# EAGLE board telemetry box (EAGLE 6.3)
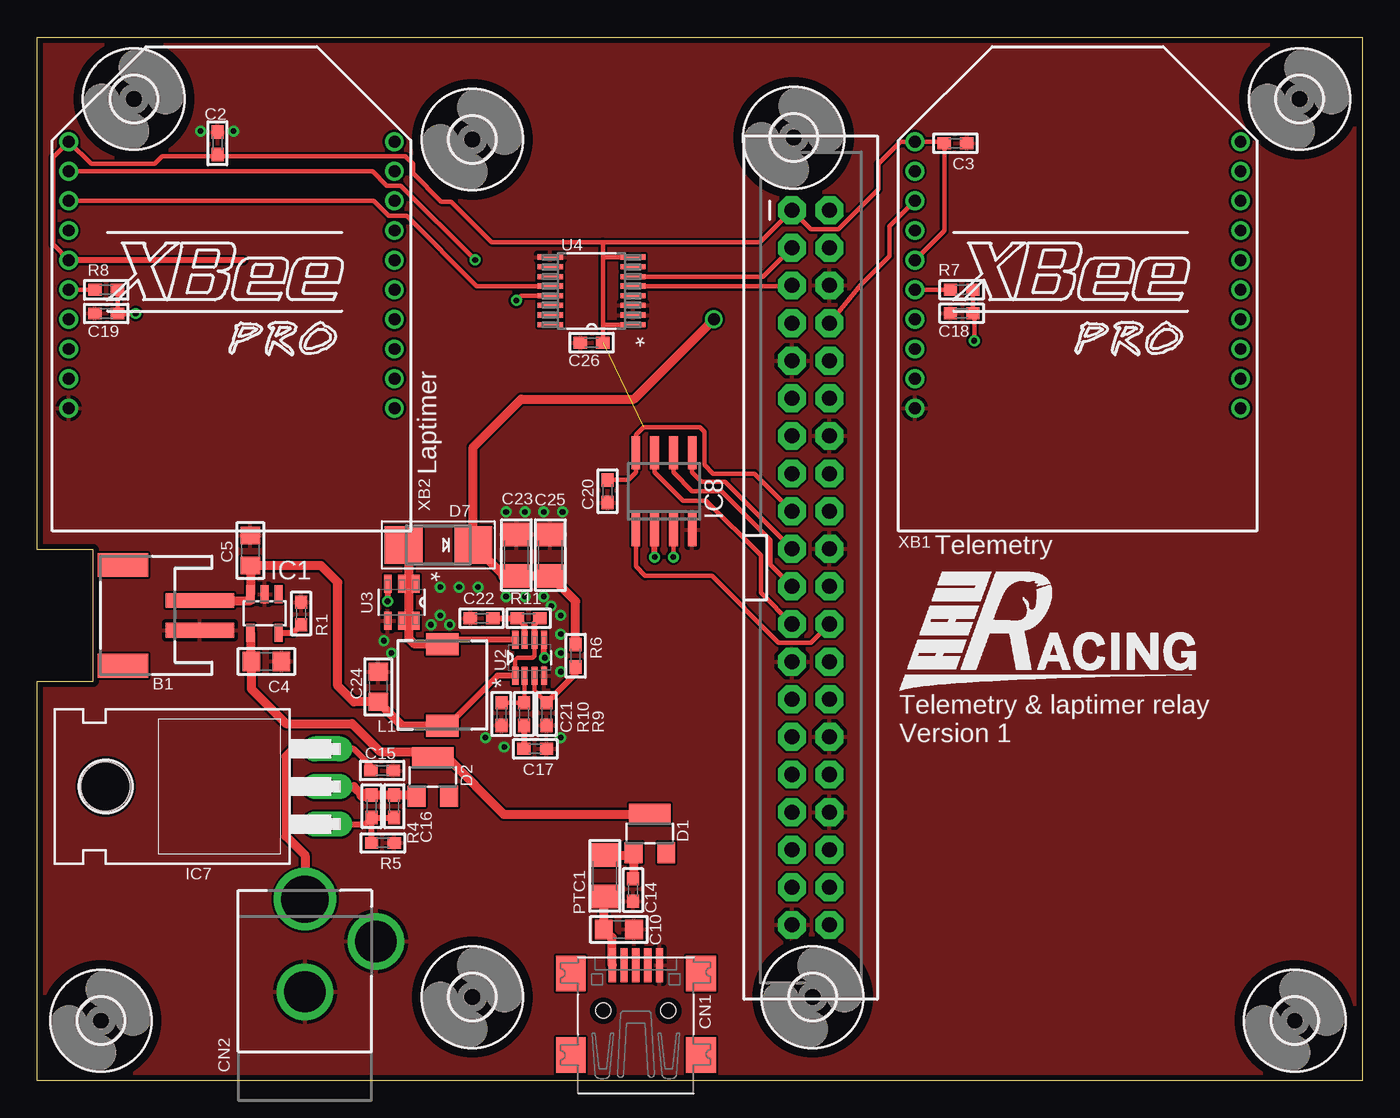
[diagram p0: board, top side]
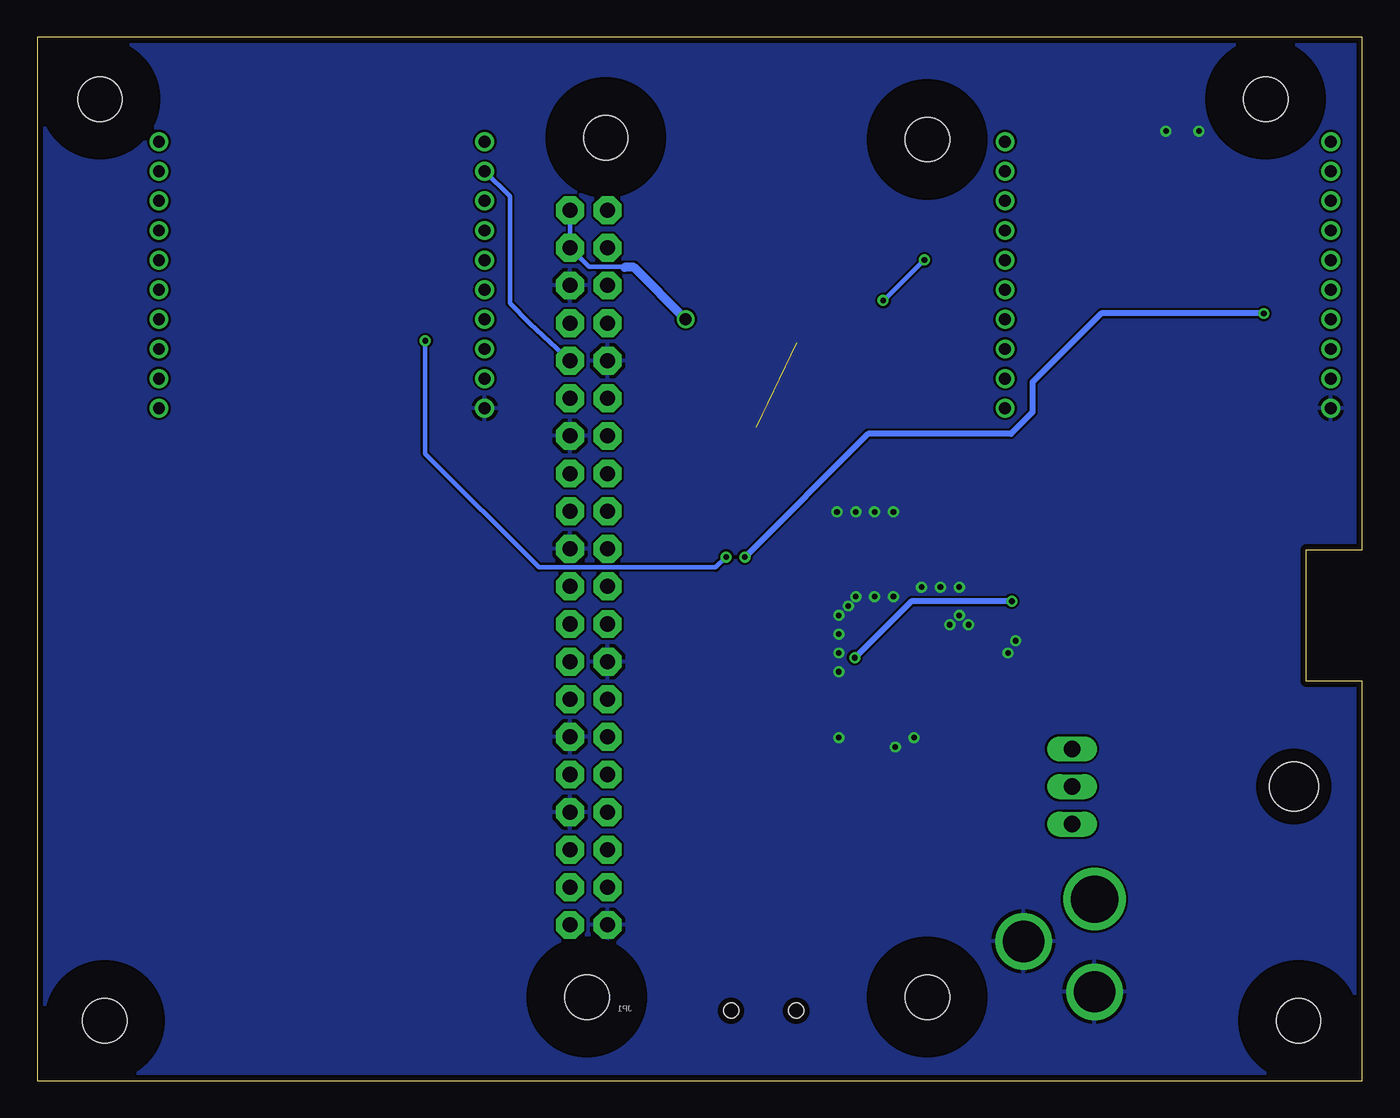
[diagram p1: board, bottom side, seen from below]

Size 89.53 x 70.48 mm. Coordinates in mm from the lower left corner, seen from the top.
Outline: 0,0 0,26.99 3.81,26.99 3.81,35.88 0,35.88 0,70.48 89.53,70.48 89.53,0 0,0
Copper layers (1*16): Top 0.0356mm / dielectric 1.5011mm / Bottom 0.0356mm
Design rules "LaenPCBOrder": minimum track width 6mil, minimum drill 13mil, track to track 6mil, track to pad 6mil, pad to pad 6mil, via to via 6mil, smd to smd 6mil, copper to edge 15mil, drill to drill 6mil, minimum pad ring 7mil, minimum via ring 7mil, stop-mask expansion 3mil, vias tented up to drill 0mil, thermal gap 10mil

## Footprints (pad centres in the part's own frame; a part is rotated, then mirrored left to right if it is on the bottom)
JSTPH2 = smd 1 x 4.6: 1 -1,-3.7; 2 1,-3.7 | smd 1.6 x 3.4: NC1 -3.4,1.5; NC2 3.4,1.5
_0603 = smd 0.9 x 0.8: 1 -0.762,0; 2 0.762,0
_0805 = smd 1.2 x 1.3: 1 -1.016,0; 2 1.016,0
1206 = smd 1.6 x 1.8: 1 -1.4,0; 2 1.4,0
USB-MINIB = smd 0.5 x 2.308: D+ 0,4.064; D- -0.8,4.064; GND 1.6,4.064; ID 0.8,4.064; VBUS -1.6,4.064 | smd 2 x 2.4: GND1 -4.4,-2; GND2 -4.4,3.5; GND3 4.4,3.5; GND4 4.4,-2 | hole 1: -2.2,1; 2.2,1
DCJACK_2MM_PTH = drill 2.8: GND 0,7.35; GNDBREAK 4.8,10.75 | drill 3.2: PWR 0,13.6
SOT23-W = smd 1.2 x 1.4: 1 -1.1,-1.3; 2 1.1,-1.3 | smd 2.8 x 1.4: 3 0,1.3
SMADIODE = smd 2.54 x 2.54: A 2.349,0; C -2.349,0
3,0 = hole 3: 0,0
SOT23-5L = smd 0.55 x 1.2: 1 -0.95,-1.3; 2 0,-1.3; 3 0.95,-1.3; 4 0.95,1.3; 5 -0.95,1.3
TO220H = drill 1.118 long: 1 -2.54,-10.16; 2 0,-10.16; 3 2.54,-10.16 | hole 3.302: 0,4.826
SO-08 = smd 0.6 x 2.2: 1 -1.905,-2.6; 2 -0.635,-2.6; 3 0.635,-2.6; 4 1.905,-2.6; 5 1.905,2.6; 6 0.635,2.6; 7 -0.635,2.6; 8 -1.905,2.6
2X20-SHROUDED = drill 1.016 pad 1.88 octagon: 1 -1.27,24.13; 2 1.27,24.13; 3 -1.27,21.59; 4 1.27,21.59; 5 -1.27,19.05; 6 1.27,19.05; 7 -1.27,16.51; 8 1.27,16.51; 9 -1.27,13.97; 10 1.27,13.97; 11 -1.27,11.43; 12 1.27,11.43; 13 -1.27,8.89; 14 1.27,8.89; 15 -1.27,6.35; 16 1.27,6.35; 17 -1.27,3.81; 18 1.27,3.81; 19 -1.27,1.27; 20 1.27,1.27; 21 -1.27,-1.27; 22 1.27,-1.27; 23 -1.27,-3.81; 24 1.27,-3.81; 25 -1.27,-6.35; 26 1.27,-6.35; 27 -1.27,-8.89; 28 1.27,-8.89; 29 -1.27,-11.43; 30 1.27,-11.43; 31 -1.27,-13.97; 32 1.27,-13.97; 33 -1.27,-16.51; 34 1.27,-16.51; 35 -1.27,-19.05; 36 1.27,-19.05; 37 -1.27,-21.59; 38 1.27,-21.59; 39 -1.27,-24.13; 40 1.27,-24.13
INDUCTOR_6X6MM_TDK_SLF6045 = smd 1.5 x 2.2: P$1 -2.75,0; P$2 2.75,0
SOT65P280X100-8N = smd 1.219 x 0.406: 1 -1.219,0.965; 2 -1.219,0.33; 3 -1.219,-0.33; 4 -1.219,-0.965; 5 1.219,-0.965; 6 1.219,-0.33; 7 1.219,0.33; 8 1.219,0.965
SOT95P285X110-6N = smd 1.219 x 0.508: 1 -1.245,0.94; 2 -1.245,0; 3 -1.245,-0.94; 4 1.245,-0.94; 5 1.245,0; 6 1.245,0.94
SOP65P640X110-16N = smd 1.702 x 0.356: 1 -2.794,2.286; 2 -2.794,1.626; 3 -2.794,0.965; 4 -2.794,0.33; 5 -2.794,-0.33; 6 -2.794,-0.965; 7 -2.794,-1.626; 8 -2.794,-2.286; 9 2.794,-2.286; 10 2.794,-1.626; 11 2.794,-0.965; 12 2.794,-0.33; 13 2.794,0.33; 14 2.794,0.965; 15 2.794,1.626; 16 2.794,2.286
XBEE-PRO = drill 0.8 pad 1.27: 1 -11,9; 2 -11,7; 3 -11,5; 4 -11,3; 5 -11,1; 6 -11,-1; 7 -11,-3; 8 -11,-5; 9 -11,-7; 10 -11,-9; 11 11,-9; 12 11,-7; 13 11,-5; 14 11,-3; 15 11,-1; 16 11,1; 17 11,3; 18 11,5; 19 11,7; 20 11,9

## Placement (x,y rotation side)
B1  [JSTPH2]  7.3,31.43 90 top
C2  100n  [_0603]  12.19,63.31 270 top
C3  100n  [_0603]  62.04,63.31 180 top
C4  10u  [_0805]  15.49,28.32 180 top
C5  10u  [_0805]  14.41,35.81 270 top
C10  10u  [_0805]  39.31,10.22 0 top
C14  100n  [_0603]  40.26,12.89 90 top
C15  100n  [_0603]  23.3,20.95 180 top
C16  1u-T  [_0603]  24.13,18.54 270 top
C17  1n8  [_0603]  33.66,22.42 180 top
C18  1u  [_0603]  62.46,51.83 0 top
C19  1u  [_0603]  4.67,51.82 0 top
C20  100n  [_0603]  38.54,39.81 90 top
C21  47p  [_0603]  31.37,24.77 90 top
C22  1n  [_0603]  30.04,31.24 0 top
C23  100u  [1206]  32.39,35.5 90 top
C24  10u  [_0805]  23.05,26.61 270 top
C25  100u  [1206]  34.67,35.5 90 top
C26  100n  [_0603]  37.47,49.85 0 top
CN1  [USB-MINIB]  40.45,3.75 0 top
CN2  [DCJACK_2MM_PTH]  18.1,-1.33 0 top
D1  [SOT23-W]  41.4,16.7 0 top
D2  [SOT23-W]  26.73,20.51 0 top
D7  B320  [SMADIODE]  27.11,36.2 180 top
H1  MOUNT-HOLE3.0  [3,0]  51.12,63.69 0 top
H2  MOUNT-HOLE3.0  [3,0]  29.4,63.56 0 top
H3  MOUNT-HOLE3.0  [3,0]  29.4,5.65 0 top
H4  MOUNT-HOLE3.0  [3,0]  52.39,5.65 0 top
H5  MOUNT-HOLE3.0  [3,0]  4.32,4.06 0 top
H6  MOUNT-HOLE3.0  [3,0]  84.96,4.06 0 top
H7  MOUNT-HOLE3.0  [3,0]  85.28,66.29 0 top
H8  MOUNT-HOLE3.0  [3,0]  6.54,66.29 0 top
IC1  MCP73831/OT  [SOT23-5L]  15.37,31.56 180 top
IC7  317T  [TO220H]  9.46,19.88 90 top
IC8  MCP3202SN  [SO-08]  42.35,39.81 0 top
JP1  RASPBERRYPI-B+-GPIO  [2X20-SHROUDED]  52.26,34.66 0 top
L1  FDVE0630-H-1R0M  [INDUCTOR_6X6MM_TDK_SLF6045]  27.37,26.73 270 top
PTC1  [1206]  38.35,13.84 270 top
R1  5k  [_0603]  17.84,31.56 270 top
R4  240  [_0603]  22.61,18.54 90 top
R5  732  [_0603]  23.37,16.07 180 top
R6  34k8  [_0603]  36.39,28.7 270 top
R7  850  [_0603]  62.46,53.42 0 top
R8  850  [_0603]  4.67,53.41 0 top
R9  11k  [_0603]  34.42,24.77 270 top
R10  17k4  [_0603]  32.89,24.77 270 top
R11  1m  [_0603]  33.21,31.24 0 top
U2  LTC3872ETS8TRMPBF  [SOT65P280X100-8N]  33.27,28.58 90 top
U3  SI3460DDV-T1-GE3  [SOT95P285X110-6N]  24.64,32.32 270 top
U4  SC16IS740IPW,112  [SOP65P640X110-16N]  37.47,53.34 180 top
XB1  XBEE-PRO  [XBEE-PRO]  70.29,54.42 0 top
XB2  XBEE-PRO  [XBEE-PRO]  13.14,54.42 0 top

## Library data of the parts
B1 C2-C5 C10 C14-C26 L1 PTC1 R1 R4-R11 XB1 XB2 = microbuilder
CN1 CN2 D1 D2 D7 IC1 = adafruit
H1-H8 = holes
IC7 = linear
IC8 = microchip; MF: MICROCHIP; MPN: MCP3202-CI/SN; OC_FARNELL: 1196803; OC_NEWARK: 19C7207
JP1 = SparkFun-Boards
U2 = LTC_By_element14_Batch_1; MPN: LTC3872ETS8#TRMPBF; OC_FARNELL: 1556409; OC_NEWARK: 56M8617; PACKAGE: SOT-23-8; SUPPLIER: LINEAR TECHNOLOGY
U3 = Vishay_By_element14_Batch_1; MPN: SI3457CDV-T1-GE3; OC_FARNELL: 1840420; OC_NEWARK: 90R9127; PACKAGE: TSOP-6; SUPPLIER: Vishay Siliconix
U4 = NXP-SC16IS740IPW-112; MPN: SC16IS740IPW,112; OC_FARNELL: 2101308; OC_NEWARK: 70R8982; PACKAGE: 16TSSOP; SUPPLIER: NXP

## Nets
3.3V: C2.2 C3.2 C20.2 C26.2 IC8.8 JP1.1 JP1.17 U4.1 U4.8 XB1.1 XB1.5 XB2.1 XB2.5
5.0V: C23.1 C25.1 D7.C JP1.2 JP1.4 R6.1
BAT-STAT1: IC1.1
CE0: IC8.1 JP1.24
CHARGE-DONE: JP1.7
CHARGING: JP1.11
GND: B1.1 C2.1 C3.1 C4.1 C5.1 C10.2 C14.1 C15.1 C17.1 C18.1 C19.1 C20.1 C21.1 C22.1 C23.2 C24.1 C25.2 C26.1 CN1.GND CN2.GND CN2.GNDBREAK IC1.2 IC8.4 JP1.6 JP1.9 JP1.14 JP1.20 JP1.25 JP1.30 JP1.34 JP1.39 R1.1 R5.1 R9.2 U2.4 U3.4 U4.2 U4.3 U4.9 XB1.10 XB2.10
LAP-RX: U4.13 XB2.2
LAP-TX: U4.12 XB2.3
LAPRSSISENSE: C19.2 IC8.2 R8.2
MISO: IC8.6 JP1.21
MOSD: D7.A L1.P$1 U2.8 U3.1 U3.2 U3.5 U3.6
MOSI: IC8.5 JP1.19
N$2: IC1.5 R1.2
N$17: C10.1 CN1.VBUS PTC1.2
N$18: C16.2 IC7.1 R4.1 R5.2
N$19: R6.2 R9.1 U2.3
N$20: C16.1 D2.1 IC7.2 R4.2
N$21: C14.2 D1.1 PTC1.1
N$22: C15.2 CN2.PWR IC7.3
N$23: R7.1 XB1.6
N$24: R8.1 XB2.6
N$25: U2.5 U3.3
N$26: C17.2 R10.2
N$27: C21.2 R10.1 U2.2
N$29: C22.2 R11.1 U2.7
SCL: JP1.5 U4.5
SCLK: IC8.7 JP1.23
SDA: JP1.3 U4.6
TELE-RX: JP1.10 XB1.2
TELE-TX: JP1.8 XB1.3
TELERSSISENSE: C18.2 IC8.3 R7.2
VBAT: B1.2 C5.2 C24.2 IC1.3 L1.P$2 R11.2 U2.1 U2.6
VCC: C4.2 D1.3 D2.3 IC1.4

## Tracks (layer width: path | path; a pad name or v marks a point on that pad's centre or on a via)
3.3V  (1 unrouted)
  Top 0.305: 38.23,56.64 30.69,56.64 27.96,59.37 27.31,59.37 25.4,61.28 25.4,61.91 24.91,62.4 24.91,62.42 12.32,62.42 | 38.23,56.64 48.84,56.64 JP1.1 52.28,57.5 54.13,57.5 56.83,60.2 56.83,61.91 58.34,63.42 XB1.1 61.17,63.42 C3.2 61.28,57.4 XB1.5 | XB2.5 1.08,56.48 1.08,62.35 XB2.1 3.65,61.91 7.94,61.91 8.45,62.42 12.32,62.42 | C26.2 38.23,51.05 | 38.23,51.05 38.23,55.63 | 38.23,55.63 38.23,56.64 | U4.8 38.23,55.63 | U4.1 38.23,51.05 | C20.2 39.94,40.58 40.45,41.08 IC8.8 40.45,43.62 40.96,44.13 44.77,44.13 45.09,43.81 45.09,41.59 45.67,41.01 48.45,41.01 JP1.17 | C2.2 12.32,62.42
  Top 0.406: 13.92,55.42 XB2.5
5.0V  (via drill 0.8)
  Top 0.61: 31.56,34.1 D7.C 29.46,42.8 32.7,46.04 40.32,46.04 v45.72,51.44 | C23.1 C25.1 36.39,32.38 R6.1
  Top 0.813: 31.56,34.1 C23.1
  Bottom 0.305: JP1.2 JP1.4 52.24,54.96 49.88,54.96 49.85,54.93
  Bottom 0.61: v45.72,51.44 49.21,54.93 49.85,54.93
CE0
  Top 0.305: IC8.1 40.45,34.73 41.09,34.1 45.59,34.1 50.1,29.59 52.27,29.59 JP1.24
GND  (via drill 0.38)
  other vias: 31.69,38.42 32.96,38.42 34.23,38.42 35.5,38.42 27.24,33.34 28.51,33.34 29.78,33.34 31.69,32.7 32.96,32.7 34.23,32.7 26.61,30.8 27.24,31.43 27.88,30.8 35.37,27.62 35.37,28.89 35.37,30.16 35.37,31.43 34.73,32.07 35.37,23.18 30.29,23.18 31.56,22.54 23.94,28.89 23.43,29.72 11.05,64.14 13.27,64.14
  pour Top: 0,0 0,26.99 3.81,26.99 3.81,35.88 0,35.88 0,70.48 89.53,70.48 89.53,0
  pour Bottom: 0,0 0,26.99 3.81,26.99 3.81,35.88 0,35.88 0,70.48 89.53,70.48 89.53,0
LAP-RX  (via drill 0.38)
  Top 0.305: v29.59,55.44 24.57,60.45 23.62,60.45 22.65,61.42 XB2.2 | U4.13 32.69,53.01 v32.39,52.7
  Bottom 0.305: v32.39,52.7 32.32,52.7 v29.59,55.44
LAP-TX
  Top 0.305: U4.12 29.7,53.67 24.95,58.42 23.75,58.42 22.75,59.42 XB2.3
LAPRSSISENSE  (via drill 0.38)
  Top 0.305: R8.2 C19.2
  Top 0.406: C19.2 v6.67,51.82 | v41.72,35.37 IC8.2
  Bottom 0.406: v6.67,51.82 17.65,51.82 22.29,47.18 22.29,45.15 23.75,43.69 33.4,43.69 v41.72,35.37
MISO
  Top 0.305: IC8.6 42.99,41.08 44.26,39.81 46.23,39.81 49.53,36.51 49.53,34.85 JP1.21
MOSD
  Top 0.406: U3.5 25.11,31.08 U3.6 | U3.2 U3.1 25.42,33.72 25.15,33.72 | U2.8 27.37,29.79 L1.P$1
  Top 0.61: L1.P$1 25.51,29.48 25.15,29.84 25.15,31.11 25.15,33.72 25.15,35.81 arc90 D7.A
  Top 0.813: 25.11,31.08 arc90 25.15,31.11
MOSI
  Top 0.305: IC8.5 44.26,41.08 44.89,40.45 46.47,40.45 JP1.19
N$2
  Top 0.406: IC1.5 17.31,30.26 R1.2
N$17
  Top 0.61: CN1.VBUS 38.85,9.66 C10.1 38.29,12.38 PTC1.2
N$18
  Top 0.406: IC7.1 22.16,17.34 R4.1 | R4.1 C16.2 | R5.2 R4.1
N$19
  Top 0.305: U2.3 33.6,26.34 R9.1
  Top 0.406: R6.2 36.39,27.5 R9.1
N$20
  Top 0.61: R4.2 C16.1 25.63,19.3 D2.1 | IC7.2 21.4,19.88 21.97,19.3
  Top 0.813: 21.97,19.3 R4.2
N$21
  Top 0.61: PTC1.1 40.14,15.24 D1.1 40.3,13.7 C14.2
N$22
  Top 0.406: C15.2 22.54,21.27 21.4,22.42 19.05,22.42
  Top 0.61: 19.05,22.42 17.34,22.42 16.83,21.91 16.83,16.51 18.1,15.24 CN2.PWR
  Top 0.813: IC7.3 19.05,22.42
N$23
  Top 0.305: XB1.6 R7.1
N$24
  Top 0.305: XB2.6 2.14,53.41 R8.1
N$25  (via drill 0.38)
  Top 0.406: U3.3 23.69,33.57 v23.69,32.38 | v34.29,28.58 34.24,28.63 U2.5
  Bottom 0.406: v23.69,32.38 30.48,32.38 v34.29,28.58
N$26
  Top 0.406: R10.2 C17.2
N$27
  Top 0.305: U2.2 32.94,25.58 R10.1 C21.2
N$29
  Top 0.406: C22.2 R11.1 32.94,30.75 U2.7
SCL
  Top 0.305: U4.5 50.95,53.67 JP1.5
SCLK
  Top 0.305: IC8.7 41.72,41.08 43.62,39.18 45.2,39.18 48.89,35.48 48.89,32.94 JP1.23
SDA
  Top 0.305: U4.6 49.05,54.31 JP1.3
TELE-RX
  Bottom 0.305: JP1.10 56.25,51.17 57.59,52.51 57.59,59.72 XB1.2
TELE-TX
  Top 0.305: JP1.8 55.61,53.71 57.59,55.69 57.59,57.72 XB1.3
TELERSSISENSE  (via drill 0.38)
  Top 0.305: R7.2 C18.2 63.31,51.83 v63.31,49.97 | IC8.3 v42.99,35.37
  Bottom 0.305: v42.99,35.37 43.69,34.67 55.63,34.67 63.31,42.35 v63.31,49.97
VBAT
  Top 0.305: U2.1 32.31,28.44 32.45,28.58 33.46,28.58 33.6,28.71 U2.6
  Top 0.406: U2.6 33.6,30.87 R11.2 | U2.1 31.1,27.36 27.94,24.19 27.58,24.19 L1.P$2
  Top 0.61: L1.P$2 24.66,23.98 C24.2 21.4,25.59 20.32,26.67 20.32,33.66 19.18,34.8 C5.2 | B1.2 14.42,32.43 IC1.3 C5.2
  Top 0.813: 27.11,23.73 L1.P$2 | C5.2
VCC
  Top 0.61: IC1.4 14.42,28.38 | C4.2 14.48,26.48 16.83,24.13 21.27,24.13 23.18,22.23 26.32,22.23 D2.3 | 27.72,21.81 31.53,18 D1.3
  Top 0.813: 14.42,28.38 C4.2 | D2.3 27.72,21.81

## Text on the board
tSilk: Laptimer | Telemetry | Telemetry & laptimer relay / Version 1